# Altium PCB remote.PcbDoc
Units mm, origin at the board's own origin, x right, y up, seen from the top; angles counter-clockwise.
Board outline 81.25 x 49.34 mm, 2 copper layers (Top Layer, Bottom Layer); 35 components, 50 nets, 205 pads, 40 vias.
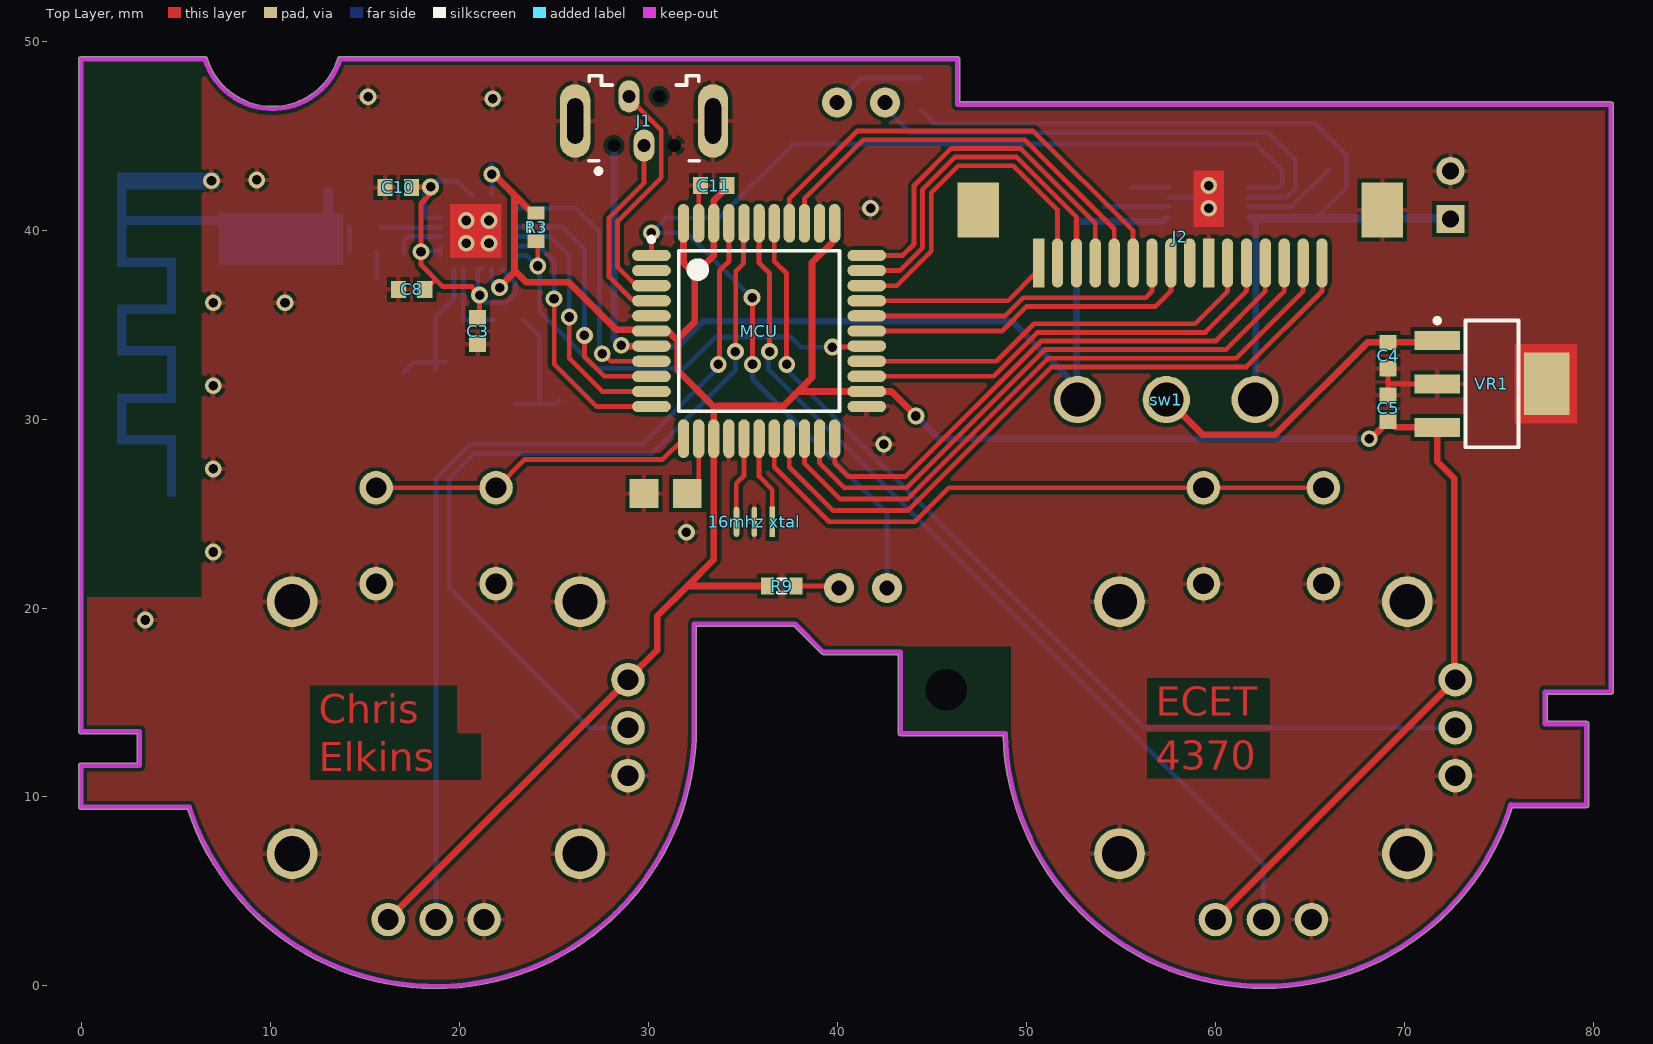
[diagram p0: Top Layer view]
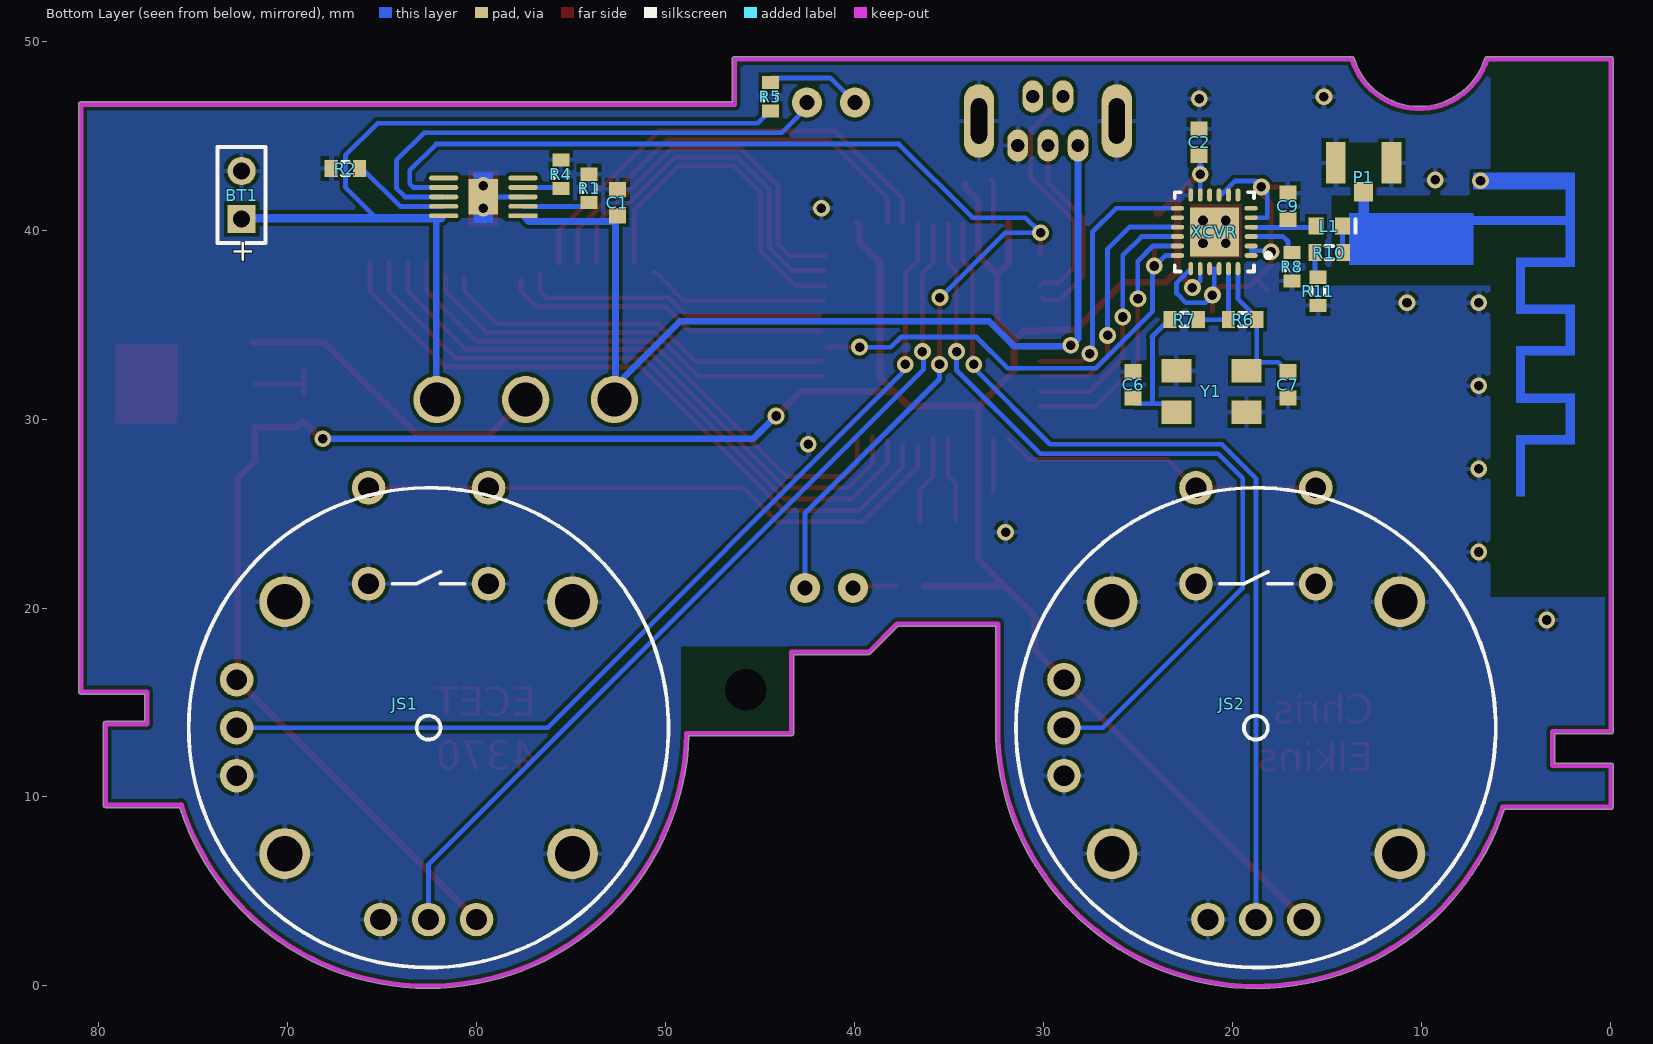
[diagram p1: Bottom Layer view, seen from below]

## Layer stack, top to bottom
Top Layer: signal copper 0.0356
Dielectric: dielectric 0.32, FR-4, Dk 4.8
Bottom Layer: signal copper 0.0356

## Board outline
-0.177,9.47 -0.177,11.67 cw(c-0.05,11.67) -0.05,11.797 2.923,11.797 2.923,13.343 -0.05,13.343 cw(c-0.05,13.47) -0.177,13.47 -0.177,49.07 cw(c-0.05,49.07) -0.05,49.197 6.49,49.197 cw(c6.49,49.07) 6.503,49.197 cw(c6.508,49.069) 6.63,49.107 ccw(c10.09,50.18) 13.549,49.104 cw(c13.671,49.066) 13.625,49.185 cw(c13.68,49.07) 13.68,49.197 46.35,49.197 cw(c46.35,49.07) 46.477,49.07 46.477,46.797 80.95,46.797 cw(c80.95,46.67) 81.077,46.67 81.077,15.57 cw(c80.95,15.57) 80.95,15.443 77.577,15.443 77.577,13.997 79.65,13.997 cw(c79.65,13.87) 79.777,13.87 79.777,9.57 cw(c79.65,9.57) 79.648,9.443 75.734,9.443 cw(c62.579,13.682) 48.766,13.243 43.35,13.243 cw(c43.35,13.37) 43.223,13.37 43.223,17.543 39.25,17.543 cw(c39.25,17.67) 39.16,17.58 37.697,19.043 32.527,19.043 32.527,13.693 cw(c32.408,13.65) 32.535,13.65 32.535,13.649 cw(c18.715,13.677) 5.591,9.343 -0.05,9.343 cw(c-0.05,9.47)

## Design rules (kind name [scope] priority, off if disabled: settings)
Clearance "solder mask clearance" [(OnLayer('Top Solder') OR OnLayer('Bottom Solder'))] p1: gap=0.051
Clearance [All] p2: gap=0.2
PolygonConnect [All] p1: connectstyle=Relief reliefconductorwidth=0.254 reliefentries=4 polygonreliefangle="90 Angle" airgapwidth=0.254
RoomDefinition U_power [InComponentClass('U_power')] p1: confinementstyle=ConfineOut formatcopy=TRUE lockcomponents=FALSE outline 288.68,37.06 224.48,37.06 224.48,52.66 288.68,52.66
RoomDefinition U_joysticks [InComponentClass('U_joysticks')] p2: confinementstyle=ConfineOut formatcopy=TRUE lockcomponents=FALSE outline 235.16,1.86 287.76,1.86 287.76,27.76 235.16,27.76
RoomDefinition U_xcvr [InComponentClass('U_xcvr')] p3: confinementstyle=ConfineOut formatcopy=TRUE lockcomponents=FALSE outline 306.87,28.52 220.371,28.52 220.371,36.42 306.87,36.42
RoomDefinition U_mcu [InComponentClass('U_mcu')] p4: confinementstyle=ConfineOut formatcopy=TRUE lockcomponents=FALSE outline 198.25,-21.73 243.85,-21.73 243.85,-4.33 198.25,-4.33
RoomDefinition U_connectors [InComponentClass('U_connectors')] p5: confinementstyle=ConfineOut formatcopy=TRUE lockcomponents=FALSE outline 253.39,-28.04 268.39,-28.04 268.39,-1.34 253.39,-1.34
RoutingVias [All] p1: holewidth=0.711 width=1.27 viastyle="Through Hole" minholewidth=0.711 minwidth=1.27 maxholewidth=0.711 maxwidth=1.27
SilkToSolderMaskClearance SilkscreenOverComponentPads [IsPad] p1: minsilkscreentomaskgap=0.254 clearancetoexposedcopper=TRUE
SolderMaskExpansion [All] p1: expansion=0.102
Width [All] p1: maxlimit=5 minlimit=0.254 preferedwidth=0.254
27 further rules are at their usual default settings.

## Classes and differential pairs
component class U_joysticks: JS1 JS2 JS?
component class U_xcvr: C2 C3 C6 C7 C8 C9 C10 E1 L1 P1 R3 R6 R7 R8 R10 R11 XCVR Y1
component class U_power: BT1 C1 C4 C5 chg1 D1 R1 R2 R4 R5 sw1 VR1
component class U_mcu: "16mhz xtal" C11 D2 MCU R9
component class U_connectors: J1 J2

## Components (designator, comment, footprint, x,y, rotation, side; value= is the part's Value field where it differs from the comment)
"16mhz xtal" "NCSTCE16M0V53-R0" OSC 36.55,24.57 r180 top
BT1 "Battery" BAT-2 72.45,41.87 r90 bottom
C1 "Cap Semi" CAPC1608L 52.55,41.47 r270 bottom
C2 "Cap Semi" CAPC1608L 21.75,44.67 r270 bottom
C3 "Cap Semi" CAPC1608L 20.95,34.67 r90 top
C4 "Cap Semi" CAPC1608L 69.15,33.37 r90 top
C5 "Cap Semi" CAPC1608L 69.15,30.57 r270 top
C6 "Cap Semi" CAPC1608L 25.25,31.82 r270 bottom
C7 "Cap Semi" CAPC1608L 17.05,31.82 r90 bottom
C8 "Cap Semi" CAPC1608L 17.45,36.87 r0 top
C9 "Cap Semi" CAPC1608L 17.05,41.27 r90 bottom
C10 "Cap Semi" CAPC1608L 16.75,42.27 r180 top
C11 "Cap Semi" CAPC1608L 33.45,42.37 r180 top
J1 "5000750517" 5000750517 29.76,45.79 r0 top
J2 "flat flex connector" "flex con" 50.35,36.97 r0 top
JS1 "joystick" Joystick 62.55,13.67 r180 bottom
JS2 "joystick" Joystick 18.75,13.67 r180 bottom
L1 "Inductor" INDC1608L 14.87,40.22 r0 bottom
MCU "ATMega32u4" TQFP44_M 35.85,34.67 r0 top
P1 "u.fl" "U.FL connector" 13.05,43.57 r180 bottom
R1 "Res3" RESC1608L 54.05,42.22 r270 bottom
R2 "Res3" RESC1608L 66.95,43.27 r180 bottom
R3 "Res3" RESC1608L 24.05,40.17 r90 top
R4 "Res3" RESC1608L 55.55,42.97 r270 bottom
R5 "Res3" RESC1608L 44.45,47.07 r270 bottom
R6 "Res3" RESC1608L 19.45,35.27 r180 bottom
R7 "Res3" RESC1608L 22.55,35.27 r180 bottom
R8 "Res3" RESC1608L 16.85,38.07 r90 bottom
R9 "Res3" RESC1608L 37.05,21.17 r0 top
R10 "Res3" RESC1608L 14.87,38.82 r180 bottom
R11 "Res3" RESC1608L 15.45,36.77 r270 bottom
sw1 "switch" switch 57.41,31.04 r270 top
VR1 "NCP1117ST33T3G" SOT223-4N 74.65,31.87 r0 top
XCVR "CYRF8935" QFN50P400X400-24VAL 20.95,39.92 r0 bottom
Y1 "XTAL" PCBComponent_1 22.95,30.37 r180 bottom

## Footprints (in the part's own frame and the unit in brackets; to place one, negate y for a bottom-side part, rotate by r counter-clockwise, add the part's x,y. Pads: shape width x height; smd on the part's side, far side on the other; paste and mask are expansions set on the pad)
5000750517 [mm] "Connector; USB Mini-B, Type 2, Thru-Hole; 5 Position; Vertical"
  round 0.4 / inner round 0.4 / far side oval 1.1x1.7 hole 0.7: 1(-1.6,-1.3) 4(0.8,1.3) 5(1.6,-1.3)
  oval 1.1x1.7 / inner round 0.4 / far side oval 1.1x1.7 hole 0.7: 2(-0.8,1.3) 3(0,-1.3)
  oval 1.6x3.9 / inner oval 0.55x2.1 / far side oval 1.6x3.9 hole 0.85 slot 2.4 at 90 deg: 6(3.65,0) 7(-3.65,0)
  silkscreen extent -2.91,-2.77 2.91,2.4, body extent -3.85,-2.1 3.85,2.4, height 7.7
BAT-2 [mm] "Multicell Battery; 2 Leads"
  rect 1.5x1.5 hole 0.9: 1(-1.27,0)
  round 1.5 hole 0.9: 2(1.27,0)
  silkscreen extent -2.54,-1.27 2.54,1.27
CAPC1608L [mm] "Chip Capacitor, Body 1.6x0.8mm, IPC High Density"
  rect 0.8x0.9 smd: 1(-0.7,0) 2(0.7,0)
  body extent -0.87,-0.48 0.87,0.48, height 1.3
"flex con" [mm]
  rect 2.2x2.9 smd: 0(-2.9,4.1) 0(18.5,4.1)
  rect 0.6x2.6 smd: 1(0.3,1.3) 10(9.3,1.3)
  oval 0.6x2.6 smd: 2(1.3,1.3) 3(2.3,1.3) 4(3.3,1.3) 5(4.3,1.3) 6(5.3,1.3) 7(6.3,1.3) 8(7.3,1.3) 9(8.3,1.3) 11(10.3,1.3) 12(11.3,1.3) 13(12.3,1.3) 14(13.3,1.3) 15(14.3,1.3) 16(15.3,1.3)
INDC1608L [mm] "Chip Inductor, Body 1.6x0.8mm, IPC High Density"
  rect 0.8x0.9 smd: 1(-0.7,0) 2(0.7,0)
  silkscreen extent -1.4,-0.35 -1.4,0.35, body extent -0.87,-0.48 0.87,0.48, height 0.55
Joystick [mil]
  round 70 hole 43.31: B1A(-125,500) B1B(125,500) B2A(-125,300) B2B(125,300) H1(-100,-400) H2(0,-400) H3(100,-400) V1(-400,100) V2(-400,0) V3(-400,-100)
  round 105.75 hole 73.62: MOUNT1(-300,262.5) MOUNT2(-300,-262.5) MOUNT3(300,-262.5) MOUNT4(300,262.5)
  silkscreen extent -500,-500 500,500
OSC [mm]
  rect 0.3x1.6 smd: 1(0,0)
  oval 0.3x1.6 smd: 2(0.95,0) 3(1.9,0)
PCBComponent_1 [mm]
  rect 1.6x1.25 smd: 1(0,0) 2(3.7,2.2) 3(0,2.2) 3(3.7,0)
QFN50P400X400-24VAL [mm] "24-Pin Plastic Quad Flat No-Lead 0.5 mm Pitch"
  oval 0.7x0.25 smd mask+0.09: 1(-1.95,1.25) 2(-1.95,0.75) 3(-1.95,0.25) 4(-1.95,-0.25) 5(-1.95,-0.75) 6(-1.95,-1.25) 13(1.95,-1.25) 14(1.95,-0.75) 15(1.95,-0.25) 16(1.95,0.25) 17(1.95,0.75) 18(1.95,1.25)
  oval 0.25x0.7 smd mask+0.09: 7(-1.25,-1.95) 8(-0.75,-1.95) 9(-0.25,-1.95) 10(0.25,-1.95) 11(0.75,-1.95) 12(1.25,-1.95) 19(1.25,1.95) 20(0.75,1.95) 21(0.25,1.95) 22(-0.25,1.95) 23(-0.75,1.95) 24(-1.25,1.95)
  rect 2.6x2.6 smd mask+0.09: 25(0,0)
  silkscreen extent -2.97,-2.1 2.1,2.1, body extent -2.07,-2.07 2.07,2.07, height 1
RESC1608L [mm] "Chip Resistor, Body 1.6x0.8mm, IPC High Density"
  rect 0.7x0.9 smd: 1(-0.75,0) 2(0.75,0)
  silkscreen extent -0.2,-0.35 0.2,0.35, body extent -0.85,-0.48 0.85,0.48, height 0.9
SOT223-4N [mm] "SOT223, 4-Leads, Body 6.5x3.5mm, Pitch 2.3mm, Lead Span 7mm, IPC Medium Density"
  rect 2.4x1 smd: 1(-2.9,2.3) 2(-2.9,0) 3(-2.9,-2.3)
  rect 2.4x3.3 smd: 4(2.9,0)
  silkscreen extent -3.02,-3.35 1.4,3.47, body extent -1.85,-3.35 1.85,3.35, height 1.7
switch [mm]
  round 2.5 hole 1.8: 1(0,4.7) 2(0,0) 3(0,-4.7)
  body extent -3.3,-6.35 3.3,6.35, height 7.85
TQFP44_M [mm] "Thin QFP, 44-Leads, Body 10x10mm, Pitch 0.8mm, IPC Low Density"
  oval 2.05x0.6 smd mask+0.07: 1(-5.7,4) 2(-5.7,3.2) 3(-5.7,2.4) 4(-5.7,1.6) 5(-5.7,0.8) 6(-5.7,0) 7(-5.7,-0.8) 8(-5.7,-1.6) 9(-5.7,-2.4) 10(-5.7,-3.2) 11(-5.7,-4) 23(5.7,-4) 24(5.7,-3.2) 25(5.7,-2.4) 26(5.7,-1.6) 27(5.7,-0.8) 28(5.7,0) 29(5.7,0.8) 30(5.7,1.6) 31(5.7,2.4) 32(5.7,3.2) 33(5.7,4)
  oval 0.6x2.05 smd mask+0.07: 12(-4,-5.7) 13(-3.2,-5.7) 14(-2.4,-5.7) 15(-1.6,-5.7) 16(-0.8,-5.7) 17(0,-5.7) 18(0.8,-5.7) 19(1.6,-5.7) 20(2.4,-5.7) 21(3.2,-5.7) 22(4,-5.7) 34(4,5.7) 35(3.2,5.7) 36(2.4,5.7) 37(1.6,5.7) 38(0.8,5.7) 39(0,5.7) 40(-0.8,5.7) 41(-1.6,5.7) 42(-2.4,5.7) 43(-3.2,5.7) 44(-4,5.7)
  silkscreen extent -5.82,-4.25 4.25,4.97, body extent -5,-5 5,5, height 1.6
"U.FL connector" [mm] "u.fl smd connector"
  rect 1x1.05 smd: 1(0,-1.525)
  rect 1.05x2.2 smd: 2(-1.475,0) 2(1.475,0)

## Part data
BT1: "Multicell Battery"
C1 C2 C3 C4 C5 C6 C7 C8 C9 C10 C11: "Capacitor (Semiconductor SIM Model)"
J1: "USB On-The-Go (OTG) Mini-B Receptacle, Right Angle, Thru-Hole, 0.80mm (.031\") Pitch, Solder Tails & Shell Tabs with Dimples"
MCU: "usb enabled avr microcontroller"
P1: library part BNC, "BNC Elbow Connector"
R1 R2 R3 R4 R5 R6 R7 R8 R9 R10 R11: "Resistor"
VR1: library part "Volt Reg", "Voltage Regulator"
Y1: "Crystal Oscillator"

## Free pads (board coordinates)
  rect 1.524x1.524 smd: 0(32.05,26.07) 1(29.75,26.07)
  round 1.524 hole 2.2 unplated: 0(45.75,15.67)
  rect 1.57x1.88 smd far side mask+0.09: 0(59.65,41.77)
  round 1.6 hole 0.8: 1(39.98,46.77) 1(40.08,21.07) 2(42.52,46.77) 2(42.62,21.07)
  rect 1.55x0.25 smd far side mask+0.09: 1(57.55,40.77)
  oval 1.55x0.25 smd far side mask+0.09: 2(57.55,41.27) 3(57.55,41.77) 4(57.55,42.27) 5(57.55,42.77) 6(61.75,42.77) 7(61.75,42.27) 8(61.75,41.77) 9(61.75,41.27) 10(61.75,40.77)

## Via types
v1: diameter 0.889, hole 0.508, Top Layer to Bottom Layer, tented both sides, 40 vias

## Nets (pads, with @x,y where several pads share a name; then routed paths per layer and width w, separated by ;. In a path a pad name is that pad's centre, name@x,y a point inside that pad or via, vN(x,y) a via of type N, cw(c..) or ccw(c..) an arc to the next point about the centre after c; other vN are vias at no path point)
GND: "16mhz xtal.2" BT1.2 C1.1 C2.1 C3.1 C4.1 C5.1 C6.1 C7.1 C8.1 C9.2 C10.2 C11.2 J1.5 J1.6 J1.7 J2.0@68.85,41.07 J2.10 JS1.B2A JS1.B2B JS1.H1 JS1.MOUNT1 JS1.MOUNT2 JS1.MOUNT3 JS1.MOUNT4 JS1.V3 JS2.B2A JS2.B2B JS2.H1 JS2.MOUNT1 JS2.MOUNT2 JS2.MOUNT3 JS2.MOUNT4 JS2.V3 MCU.5 MCU.15 MCU.23 MCU.35 MCU.43 P1.2 pad.0@59.65,41.77 pad.1@29.75,26.07 pad.3 R1.1 R2.1 R4.1 R8.1 R11.2 VR1.2 VR1.4 XCVR.12 XCVR.25 Y1.3 | length 8.1
  Top Layer w0.254: MCU.43 32.65,42.37 32.65,42.57 C11.2@32.75,42.67 ; C5.1@69.15,31.37 C4.1 ; 69.15,31.87 VR1.2
  Bottom Layer w0.254: pad.3 pad.0@59.45,41.77
  other v1: 3.35,19.37 6.95,22.97 32,24.02 6.95,27.37 42.45,28.67 6.95,31.77 6.95,36.17 10.75,36.17 20.35,39.32 21.55,39.32 20.35,40.52 21.55,40.52 41.75,41.17 59.65,41.17 59.65,42.37 6.86,42.62 9.25,42.67 21.75,46.97 15.15,47.07
"Net16mhz xtal_1": "16mhz xtal.1" MCU.17 | length 4.7
  Top Layer w0.254: MCU.17 35.85,26.97 36.55,26.27 36.55,24.57
"Net16mhz xtal_3": "16mhz xtal.3" MCU.16 | length 4.5
  Top Layer w0.254: 34.64,24.67 34.64,26.6 35.05,27.01 MCU.16
NetC4_2: C4.2 sw1.2 VR1.1 | length 17.5
  Top Layer w0.354: sw1.2@57.45,31.37 57.45,31.07 59.35,29.17 63.15,29.17 68.05,34.07 C4.2 71.75,34.07 VR1.1@71.85,34.07
NetC6_2: C6.2 R7.1 Y1.1 | length 7.2
  Bottom Layer w0.254: Y1.1@22.95,30.82 24.25,30.82 ; R7.1@23.35,35.27 24.25,34.37 24.25,34.311 24.229,34.29 24.229,30.841 24.25,30.82 ; C6.2@25.25,30.97 25.1,30.82 24.25,30.82
NetC7_2: C7.2 R6.2 XCVR.24 Y1.2 | length 8.1
  Bottom Layer w0.254: C7.2@17.02,32.47 17.06,32.51 17.57,33.02 Y1.2@18.7,33.02 ; Y1.2@18.7,32.67 Y1.2@18.7,33.02 ; R6.2 Y1.2@18.7,33.02 ; R6.2@18.7,35.37 19.7,36.37 XCVR.24 ; Y1.2@19.25,33.02 Y1.2@18.7,33.02
NetC9_1: C9.1 L1.2 XCVR.4 | length 3.2
  Bottom Layer w0.254: L1.2@15.817,40.153 17.05,40.153 18.983,40.153 XCVR.4
Netchg1_2: pad.2@57.55,41.27 R1.2 | length 3.4
  Bottom Layer w0.254: R1.2@54.15,41.27 pad.2@57.55,41.27
Netchg1_4: pad.4 R4.2 | length 2
  Bottom Layer w0.254: R4.2@55.55,42.27 pad.4
Netchg1_7: MCU.1 pad.2@42.62,21.07 pad.7 | length 65.1
  Top Layer w0.254: MCU.1@30.15,38.77 v1(30.15,39.87) ; v1@35.44,32.98 35.485,32.988 35.5,32.99 35.5,36.39 35.508,36.435 v1@35.51,36.45 ; v1(35.48,36.44) v1@35.5,36.44
  Bottom Layer w0.254: v1(30.15,39.87) 32.02,39.87 35.465,36.425 v1@35.51,36.38 ; v1@30.25,39.97 30.95,40.67 33.75,40.67 37.65,44.57 62.15,44.57 63.55,43.17 63.55,42.47 63.35,42.27 pad.7 ; v1@35.44,32.98 35.44,33.16 35.45,33.17 35.5,33.12 v1(35.5,32.9) 35.5,32.13 42.62,25.01 pad.2@42.62,21.07
Netchg1_8: pad.2@42.52,46.77 pad.8 | length 26.9
  Bottom Layer w0.254: pad.2@42.65,46.37 43.85,45.17 62.788,45.17 64.25,43.708 64.25,42.224 63.796,41.77 pad.8
Netchg1_9: pad.9 R2.2 | length 5.1
  Bottom Layer w0.254: pad.9 64.05,41.27 R2.2@66,43.22
NetD1_1: pad.1@39.98,46.77 R5.1 | length 4.9
  Bottom Layer w0.254: pad.1@39.98,46.77 41.28,48.07 R5.1@44.39,48.07
NetD2_1: pad.1@40.08,21.07 R9.2 | length 2.3
  Top Layer w0.254: R9.2 pad.1@40.05,21.17
NetE1_1: L1.1 P1.1 R10.2 | length 3.2
  Bottom Layer w0.254: R10.2@14.17,38.87 L1.1
  Bottom Layer w0.554: 13.05,40.17 P1.1
NetJ1_2: J1.2 MCU.3 | length 12.8
  Top Layer w0.254: J1.2@28.95,47.02 30.67,45.3 30.67,42.78 28.36,40.47 28.36,38.048 29.165,37.243 29.977,37.243 MCU.3
NetJ1_3: J1.3 MCU.4 | length 10.4
  Top Layer w0.254: J1.3 29.76,42.512 27.906,40.658 27.906,37.534 29.12,36.32 29.924,36.32 30.012,36.408 MCU.4@30.047,36.443
NetJ2_1: J2.1 MCU.30 | length 9.6
  Top Layer w0.254: MCU.30@41.65,36.27 49.031,36.27 50.531,37.77 J2.1@50.65,37.77
NetJ2_2: J2.2 MCU.31 | length 18.3
  Top Layer w0.254: MCU.31 43.143,37.07 44.964,38.891 44.964,41.991 46.397,43.423 49.297,43.423 51.65,41.07 J2.2
NetJ2_3: J2.3 MCU.32 | length 19.2
  Top Layer w0.254: MCU.32 43.297,37.87 44.507,39.081 44.507,42.181 46.207,43.881 49.486,43.881 52.65,40.717 J2.3
NetJ2_4: J2.4 MCU.33 | length 20
  Top Layer w0.254: MCU.33 43.45,38.67 44.05,39.27 44.05,42.37 46.018,44.338 49.675,44.338 53.65,40.363 J2.4
NetJ2_5: J2.5 MCU.36 | length 22.8
  Top Layer w0.254: MCU.36 38.25,41.67 41.375,44.795 49.925,44.795 54.65,40.07 J2.5
NetJ2_6: J2.6 MCU.37 | length 24.9
  Top Layer w0.254: MCU.37 37.45,41.67 41.032,45.252 50.368,45.252 55.65,39.97 J2.6
NetJ2_7: J2.7 MCU.29 | length 16.2
  Top Layer w0.254: MCU.29@41.85,35.47 48.877,35.47 49.835,36.428 56.308,36.428 56.65,36.77 J2.7@56.65,37.67
NetJ2_8: J2.8 MCU.28 | length 17.4
  Top Layer w0.254: MCU.28@41.75,34.67 48.724,34.67 50.024,35.97 56.85,35.97 57.65,36.77 J2.8@57.65,37.37
NetJ2_9: J2.9
NetJ2_11: J2.11 MCU.26 | length 21.1
  Top Layer w0.254: MCU.26@41.75,33.07 48.417,33.07 50.403,35.056 58.936,35.056 60.65,36.77 J2.11@60.65,37.47
NetJ2_12: J2.12 MCU.25 | length 22.6
  Top Layer w0.254: MCU.25@41.75,32.27 48.264,32.27 50.592,34.599 59.479,34.599 61.65,36.77 J2.12@61.65,37.57
NetJ2_13: J2.13 MCU.22 | length 29.8
  Top Layer w0.254: MCU.22@39.85,28.87 39.85,27.67 40.55,26.97 43.61,26.97 50.782,34.142 60.022,34.142 62.65,36.77 J2.13
NetJ2_14: J2.14 MCU.21 | length 32.3
  Top Layer w0.254: MCU.21@39.05,29.07 MCU.21 39.05,27.67 40.35,26.37 43.657,26.37 50.971,33.684 60.564,33.684 63.65,36.77 J2.14
NetJ2_15: J2.15 MCU.20 | length 34.4
  Top Layer w0.254: MCU.20@38.25,28.87 38.25,27.67 40.15,25.77 43.703,25.77 51.161,33.227 61.107,33.227 64.65,36.77 J2.15
NetJ2_16: J2.16 MCU.19 | length 36.7
  Top Layer w0.254: MCU.19@37.45,28.67 37.45,27.47 39.75,25.17 43.75,25.17 51.35,32.77 61.65,32.77 65.65,36.77 J2.16
NetJS1_B1A: JS1.B1A JS1.B1B MCU.18 | length 32.1
  Top Layer w0.254: MCU.18@36.65,28.57 36.65,27.47 39.55,24.57 44.097,24.57 45.897,26.37 JS1.B1B@59.35,26.37 ; JS1.B1B JS1.B1A JS1.B1A@65.75,26.37
NetJS1_H2: JS1.H2 MCU.39 | length 47.9
  Top Layer w0.254: MCU.39@35.85,40.27 35.85,38.27 36.4,37.72 36.4,33.69 v1@36.35,33.64
  Bottom Layer w0.254: v1@36.35,33.64 36.35,33.58 36.35,32.63 62.55,6.43 JS1.H2 JS1.H2@62.55,3.47
  other v1: 36.405,33.58
NetJS1_V2: JS1.V2 MCU.38 | length 51.3
  Top Layer w0.254: MCU.38 36.65,38.37 37.3,37.72 37.3,33.22 v1@37.25,33.17
  Bottom Layer w0.254: v1@37.25,33.08 37.25,32.9 37.25,32.67 56.25,13.67 56.55,13.67 ; 56.45,13.67 56.55,13.67 ; JS1.V2 59.35,13.67 56.55,13.67
  other v1: 37.31,32.9
NetJS2_B1A: JS2.B1A JS2.B1B MCU.12 | length 17.4
  Top Layer w0.254: JS2.B1B JS2.B1A 21.95,26.37 23.45,27.87 30.75,27.87 MCU.12
NetJS2_H2: JS2.H2 MCU.41 | length 48.8
  Top Layer w0.254: v1@33.75,33.26 33.75,37.85 34.25,38.35 MCU.41
  Bottom Layer w0.254: JS2.H2@18.75,3.77 18.75,26.87 20.55,28.67 29.65,28.67 33.75,32.77 33.75,32.9 v1@33.75,33.06 ; v1@33.69,33.02 33.708,33.02 v1@33.708,33.102 ; v1@33.708,33.154 v1@33.708,33.102 ; v1@33.708,33.102 v1@33.75,33.06 ; v1@33.708,33.102 33.69,33.12 33.69,33.21 33.75,33.27 v1@33.75,33.06
  other v1: 33.69,32.9
NetJS2_V2: JS2.V2 MCU.40 | length 44
  Top Layer w0.254: v1@34.55,33.61 34.557,33.617 34.61,33.67 34.61,37.83 35.03,38.25 35.03,40.35 MCU.40
  Bottom Layer w0.254: 25.15,28.17 25.05,28.17 ; JS2.V2 26.85,13.67 19.45,21.07 19.45,26.87 20.75,28.17 25.05,28.17 ; v1@34.585,33.665 34.547,33.628 34.545,33.625 34.593,33.578 34.6,33.57 34.6,32.6 30.17,28.17 25.05,28.17
  other v1: 34.595,33.58
NetMCU_8: MCU.8 XCVR.13 | length 14.3
  Top Layer w0.254: v1@27.4,33.67 27.575,33.495 28,33.07 MCU.8
  Bottom Layer w0.254: XCVR.13 26.15,41.17 27.4,39.92 27.4,35.269 27.4,34.109 v1@27.4,33.68
  other v1: 27.55,33.47
NetMCU_9: MCU.9 XCVR.15 | length 13.9
  Top Layer w0.254: v1@26.6,34.37 26.6,33.32 27.65,32.27 MCU.9
  Bottom Layer w0.254: XCVR.15 25.45,40.17 26.6,39.02 v1@26.6,34.47 ; v1@26.6,34.37 v1(26.6,34.44) v1@26.6,34.47 ; v1@26.67,34.47 v1@26.6,34.47
NetMCU_10: MCU.10 XCVR.16 | length 13.8
  Top Layer w0.254: v1@25.8,35.62 v1(25.8,35.41) 25.8,33.22 27.55,31.47 MCU.10
  Bottom Layer w0.254: XCVR.16 24.8,39.67 25.8,38.67 v1@25.8,35.62
NetMCU_11: MCU.11 XCVR.17 | length 14
  Top Layer w0.254: v1@25,36.45 25,36.38 25,32.92 27.25,30.67 MCU.11
  Bottom Layer w0.254: XCVR.17 24.2,39.17 25,38.37 v1@25,36.42
  other v1: 24.99,36.38
NetMCU_27: MCU.27 R3.1 XCVR.18 | length 24
  Top Layer w0.254: v1@24.13,38.38 R3.1@24.13,39.18 ; v1(39.73,33.82) MCU.27@41.48,33.82
  Bottom Layer w0.254: XCVR.18 23.52,38.67 v1@24.08,38.11 ; v1(24.13,38.11) 24.219,38.021 24.219,35.71 27.23,32.698 31.888,32.698 33.541,34.351 37.539,34.351 38.08,33.81 39.64,33.81 v1@39.69,33.86
NetR6_1: R6.1 R7.2 XCVR.23 | length 4.3
  Bottom Layer w0.254: R6.1@20.15,35.27 R6.1 ; XCVR.23 R6.1 ; R7.2 R6.1
NetR8_2: R8.2 XCVR.3 | length 2.7
  Bottom Layer w0.254: R8.2@17.05,38.77 17.05,38.82 17.05,39.42 17.3,39.67 XCVR.3
NetR10_1: R10.1 R11.1 | length 1.3
  Bottom Layer w0.254: R11.1@15.62,37.47 15.62,37.52 R10.1
VBAT: BT1.1 pad.10 R5.2 sw1.1 | length 47.4
  Bottom Layer w0.254: R5.2@44.435,46.355 44.46,46.33 45.12,45.67 65.25,45.67 66.95,43.97 66.95,42.27 65.35,40.67 ; 61.877,40.643 62.15,40.37
  Bottom Layer w0.354: sw1.1@62.15,31.37 62.15,40.37
  Bottom Layer w0.454: 61.877,40.643 BT1.1@72.45,40.643
VCC: C2.2 C5.2 C11.1 JS1.H3 JS1.V1 JS2.H3 JS2.V1 MCU.6 MCU.14 MCU.24 MCU.34 MCU.42 MCU.44 R3.2 R9.1 VR1.3 XCVR.11 XCVR.20 | length 156.8
  Top Layer w0.354: JS2.H3 JS2.V1@28.85,16.15 ; v1@22,42.87 22,42.77 22.9,41.87 ; v1@22.13,37.02 22.9,37.79 ; R3.2@24,40.92 23.85,40.92 22.9,41.87 ; JS2.V1@29.05,16.37 30.45,17.77 30.45,18.97 30.45,19.57 32.05,21.17 ; 31.55,34.27 32.45,35.17 32.45,37.67 ; MCU.44 31.85,38.27 32.45,37.67 ; MCU.14 33.45,22.57 32.05,21.17 ; MCU.14@33.45,29.07 33.45,30.52 33.63,30.7 37.14,30.7 ; 33.52,30.6 31.552,32.568 31.552,34.15 31.032,34.67 MCU.6 30.079,34.742 28.278,34.742 25.76,37.26 23.51,37.26 22.9,37.87 22.9,41.87 ; C11.1@34.15,42.47 C11.1 34.15,42.27 33.45,41.57 MCU.42 33.45,38.67 32.45,37.67 ; R9.1 32.05,21.17 ; 37.15,30.7 37.14,30.7 ; MCU.34 39.727,40.247 39.727,39.365 39.33,38.968 39.318,38.968 38.65,38.3 38.65,32.21 37.93,31.49 ; MCU.24@41.75,31.47 MCU.24 ; v1(44.15,30.17) 42.85,31.47 MCU.24 ; JS1.H3 JS1.V1@72.67,16.17 ; v1@68.25,28.97 C5.2 ; C5.2@69.35,29.77 69.55,29.57 VR1.3 71.75,27.77 72.65,26.87 JS1.V1@72.65,16.37 ; 37.14,30.7 37.93,31.49 ; 37.93,31.49 37.95,31.47 MCU.24
  Bottom Layer w0.254: XCVR.20 21.7,37.34 22.09,36.95 v1@22.13,36.91 ; XCVR.11 v1@21.7,42.62
  Bottom Layer w0.354: v1@21.7,42.62 v1(21.7,42.97) 21.7,43.42 ; v1(44.15,30.17) 45.35,28.97 v1(68.15,28.97)
  other v1: 22.11,36.97
VDD: C3.2 C8.2 C10.1 XCVR.1 XCVR.2 XCVR.5 XCVR.8 XCVR.9 XCVR.19 XCVR.21 XCVR.22 | length 23.3
  Top Layer w0.254: C10.1@17.56,42.31 17.57,42.3 v1(18.46,42.3) ; C8.2 18.2,36.87 18.71,37.38 ; v1@18.45,42.28 18.46,42.27 18.46,41.93 17.95,41.42 17.95,38.92 v1(17.95,38.87) 17.95,38.72 17.95,38.17 19.1,37.02 20.65,37.02 20.981,36.524 21.05,36.42 C3.2@21.05,35.7
  Bottom Layer w0.254: v1@18.05,38.87 18.1,38.87 17.965,38.915 17.95,38.92 19,38.92 ; 18.15,40.67 18.15,42.02 18.445,42.315 18.75,42.62 19.85,42.62 20.4,42.07 20.65,41.82 XCVR.9 ; 18.2,40.67 XCVR.5 ; XCVR.1 19,38.92 ; XCVR.2@19,39.12 19,38.92 ; XCVR.21 20.9,37.97 20.95,37.92 20.95,36.62 21.025,36.545 21.4,36.17 22.459,36.17 22.95,36.661 22.95,37.221 XCVR.19@22.226,37.946
  other v1: 21.05,36.57
VUSB: C1.2 J1.1 MCU.7 pad.1@57.55,40.77 sw1.3 | length 57.2
  Top Layer w0.354: v1(28.55,33.92) v1@28.5,33.92 ; v1@28.5,33.92 28.525,33.895 28.55,33.87 MCU.7 ; v1@28.5,33.92 28.382,34.038 28.382,33.92 28.382,33.912 28.39,33.92 v1@28.5,33.92 ; MCU.7 MCU.7@30.98,33.87 ; MCU.7 MCU.7@30.98,33.87 ; MCU.7@30.98,33.87 30.998,33.87 MCU.7@30.98,33.87
  Bottom Layer w0.354: J1.1@28.164,44.456 28.164,34.255 28.525,33.895 v1@28.55,33.87 ; pad.1@57.45,40.67 57.25,40.47 52.65,40.47 52.65,31.77 49.23,35.19 32.87,35.19 31.55,33.87 ; v1@28.55,33.87 30.98,33.87 ; v1@28.55,33.87 30.98,33.87 ; 30.98,33.87 31.55,33.87 ; 30.98,33.87 31.55,33.87
pads on no net: J1.4 J2.0@47.45,41.07 MCU.2 MCU.13 XCVR.6 XCVR.7 XCVR.10 XCVR.14
copper on no net: | length 2.8
  Top Layer w0.254: 32.65,26.17 32.65,28.97

## Polygon pours and split planes (outlines as drawn)
GND on Bottom Layer "Top Layer-No Net" (solid, remove dead copper, pour order 1000): -0.65,49.77 -0.15,49.27 83.85,49.27 83.85,6.87 68.95,-8.03 66.35,-5.43 -2.25,-5.43
GND on Top Layer "Top Layer-No Net" (solid, remove dead copper, pour order 1005): -4.842,52.65 79.469,52.65 81.648,50.359 81.85,50.146 81.85,-1.13 -8.795,-1.13 -9.42,-0.473

## Keep-outs
Keep-Out Layer:
  lines w0.254: 5.65,9.47 -0.05,9.47 -0.05,11.67 3.05,11.67 3.05,13.47 -0.05,13.47 -0.05,49.07 6.49,49.07 ; 5.685,9.465 ccw(c18.715,13.677) 32.408,13.65 ; 6.508,49.069 ccw(c10.09,50.18) 13.671,49.066 ; 13.68,49.07 46.35,49.07 46.35,46.67 80.95,46.67 80.95,15.57 77.45,15.57 77.45,13.87 79.65,13.87 79.65,9.57 ; 32.4,13.67 32.4,19.17 37.75,19.17 39.25,17.67 43.35,17.67 43.35,13.37 48.85,13.37 ; 48.89,13.371 ccw(c62.579,13.682) 75.656,9.62 ; 75.65,9.57 79.65,9.57

## Other copper
Top Layer:
  rectangle net GND: 75.85,29.77 79.15,33.97
  rectangle net GND: 19.49,38.54 22.22,41.4
  rectangle net GND: 58.85,40.17 60.45,43.17
  pour cut-out: 59.27,36.95 59.31,37.02 59.74,37.03 60.16,37.04 60.12,36.52 59.86,36.26 59.22,36.3 59.11,36.64 59.073,36.837
  pour cut-out: 39.88,39.68 39.97,39.68 40.97,38.68 40.88,38.59 40.88,30.67 39.87,29.66 39.86,29.67 31.78,29.67 30.81,30.64 30.82,30.65 30.82,38.77 30.85,38.77 31.79,39.71
  text "ECET" at 56.84,14.31 h1.52
  text "Chris" at 12.53,13.9 h1.52
  text "4370" at 56.84,11.44 h1.52
  text "Elkins" at 12.53,11.37 h1.52
Bottom Layer:
  rectangle net NetE1_1: 7.23,38.177 13.83,40.92
  region net NetE1_1: 1.85,31.37 1.85,28.67 2.35,28.67 2.35,31.37
  region net NetE1_1: 1.85,36.07 1.85,33.37 2.35,33.37 2.35,36.07
  region net NetE1_1: 2.13,33.87 2.13,33.37 4.99,33.37 4.99,33.87
  region net NetE1_1: 2.02,36.07 2.02,35.57 4.99,35.57 4.99,36.07
  region net NetE1_1: 2.2,31.37 2.2,30.87 4.99,30.87 4.99,31.37
  region net NetE1_1: 4.49,33.57 4.49,31.17 4.99,31.17 4.99,33.57
  region net NetE1_1: 4.49,38.34 4.49,35.84 4.99,35.84 4.99,38.34
  region net NetE1_1: 2.16,38.57 2.16,38.07 4.99,38.07 4.99,38.57
  region net NetE1_1: 1.85,43.07 1.85,38.07 2.35,38.07 2.35,43.07
  region net NetE1_1: 2.28,43.07 2.28,42.17 7.25,42.17 7.25,43.07
  region net NetE1_1: 2.14,40.77 2.14,40.27 7.25,40.27 7.25,40.77
  region net NetE1_1: 2.12,29.17 2.12,28.67 4.99,28.67 4.99,29.17
  region net NetE1_1: 4.49,28.89 4.49,25.91 4.99,25.91 4.99,28.89
  rectangle net GND: 59.14,40.38 60.16,43.06
  pour cut-out: 43.2,25.36 43.16,25.36 42.84,25.04 42.77,25.11 42.77,25.76
  pour cut-out: 12.05,44.67 14.15,44.67 14.05,44.57 14.05,42.47 12.05,42.47
  pour cut-out: 6.35,41.87 14.75,41.87 14.75,37.07 6.35,37.07
Multi-Layer:
  pour cut-out: 43.29,17.97 49.21,17.97 49.21,13.47 43.38,13.47 43.36,13.45
  pour cut-out: -0.05,49.07 6.35,49.07 6.35,20.57 -0.05,20.57

## Silkscreen, mask and mechanical layers (free items; w line width, h text height)
Top Overlay:
  circle w0.25: c27.34,43.125 r0.125
Top Solder:
  rectangle: 58.75,40.17 60.55,43.37
  rectangle: 75.45,27.77 80.35,35.37
  rectangle: 19.65,38.57 22.25,41.27

## Text inside footprints (layer, text, board x,y; h text height)
BT1: Bottom Overlay "+" at 71.873,38.2 h1.15 r270